# EAGLE board Active ele custom (EAGLE 7.6.0)
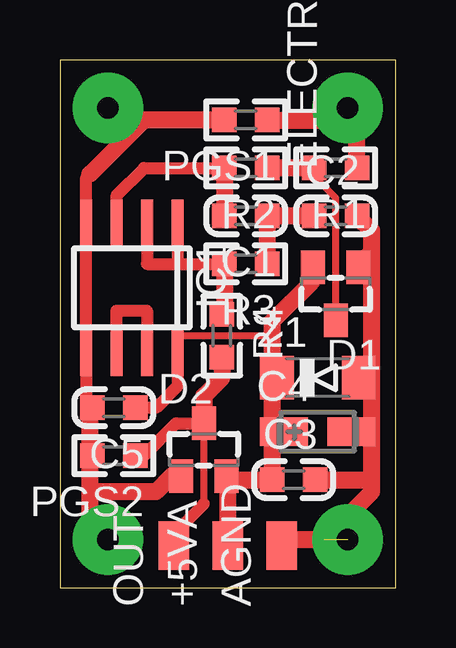
[diagram p0: board, top side]
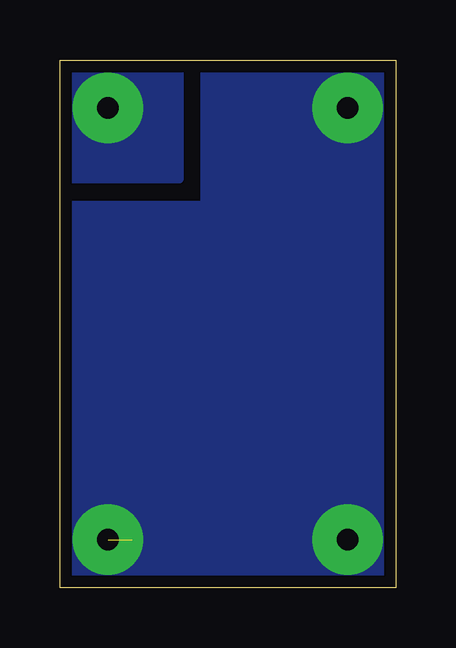
[diagram p1: board, bottom side, seen from below]

Size 14 x 22 mm. Coordinates in mm from the lower left corner, seen from the top.
Outline: 0,0 14,0 14,22 0,22 0,0
Copper layers (1*16): Top 0.035mm / dielectric 1.5mm / Bottom 0.035mm
Design rules "default *": minimum track width 10mil, minimum drill 24mil, track to track 8mil, track to pad 8mil, pad to pad 8mil, via to via 8mil, smd to smd 8mil, copper to edge 0.5mm, drill to drill 8mil, minimum pad ring 10mil, minimum via ring 40mil, stop-mask expansion 4mil, vias tented up to drill 0mil, thermal gap 15mil
Net classes: 1 pwr: width 0.4 mm, clearance 0.23 mm

## Footprints (pad centres in the part's own frame; a part is rotated, then mirrored left to right if it is on the bottom)
SMD80/50 = smd 2.032 x 1.27: P$1 0,0
C0603_DWS = smd 1.016 x 1.016: 1 -0.889,0; 2 0.889,0
CT3216 = smd 2 x 1.2: + -1.4,0; - 1.4,0
SOT23C(BAT54S) = smd 1 x 1.4: 1 -0.95,-1.1; 2 0.95,-1.1; 3 0,1.1
SO08 = smd 0.508 x 2.032: 1 -1.905,-2.667; 2 -0.635,-2.667; 3 0.635,-2.667; 4 1.905,-2.667; 5 1.905,2.667; 6 0.635,2.667; 7 -0.635,2.667; 8 -1.905,2.667
0603 = smd 1.016 x 1.016: 1 -0.889,0; 2 0.889,0
R0603_5MIL_DWS = smd 1.016 x 1.016: 1 -0.889,0; 2 0.889,0
MINI-MELF = smd 1.4 x 1.8: 1 -1.7,0; 2 1.7,0

## Placement (x,y rotation side)
+5VA  TESTPAD80/50  [SMD80/50]  7,1.75 90 top
AGND  TESTPAD80/50  [SMD80/50]  9.25,1.75 90 top
C1  100pF/COG/5%  [C0603_DWS]  7.75,15.5 180 top
C2  100pF/COG/5%  [C0603_DWS]  11.5,15.5 0 top
C3  100nF/X7R/10%  [C0603_DWS]  9.75,4.5 0 top
C4  47µF/6.3V/TANT  [CT3216]  10.75,6.5 0 top
C5  10nF/X7R/10%  [C0603_DWS]  2.25,7.5 180 top
D1  BAV199(1156415)  [SOT23C(BAT54S)]  11.5,12.25 180 top
D2  BAV199(1156415)  [SOT23C(BAT54S)]  6,5.75 0 top
ELECTRODE  TESTPAD80/50  [SMD80/50]  12,20 90 top
IC1  TL062CD  [SO08]  3,12.5 180 top
OUT  TESTPAD80/50  [SMD80/50]  4.75,1.75 90 top
PGS1  PGB1010603MR(F2594TR-ND)  [0603]  7.75,19.5 180 top
PGS2  PGB1010603MR(F2594TR-ND)  [0603]  2.25,5.5 180 top
R1  2.2k  [R0603_5MIL_DWS]  11.5,17.5 180 top
R2  2.2k  [R0603_5MIL_DWS]  7.75,17.5 180 top
R3  10k  [R0603_5MIL_DWS]  7.75,13.5 180 top
R4  100R  [R0603_5MIL_DWS]  6.75,10.5 270 top
Z1  BZV55C6V2  [MINI-MELF]  10.75,8.75 0 top

## Library data of the parts
+5VA AGND ELECTRODE OUT Z1 = gogo
C1-C5 R1-R4 = rcl
D1 D2 = semicon-smd-ipc
IC1 = linear
PGS1 PGS2 = OLIMEX_DISCRET

## Nets
+5V: +5VA.P$1 C3.1 C4.+ C5.1 D1.2 D2.2 IC1.8 Z1.1
E-OUT: D2.3 OUT.P$1 PGS2.1 R4.2
ELECTRODE: ELECTRODE.P$1 PGS1.1 R1.1
GNDA [pwr]: AGND.P$1 C2.2 C3.2 C4.- C5.2 D1.1 D2.1 IC1.4 IC1.5 PGS1.2 PGS2.2 Z1.2
N$1: IC1.6 IC1.7
N$2: IC1.1 IC1.2 R3.2 R4.1
N$4: C1.2 IC1.3 R2.2
N$5: C1.1 C2.1 R3.1
N$6: D1.3 R1.2 R2.1

## Tracks (layer width: path | path; a pad name or v marks a point on that pad's centre or on a via)
+5V
  Top 0.3: 8.86,10.5 4.91,10.5
  Top 0.5: C5.1 4,7.5 4.91,8.4 IC1.8 4.91,10.5 | Z1.1 9.05,8.69 8.86,8.5 8.86,10.5 | C4.+ 9.11,6.5 8.86,6.25
  Top 0.7: +5VA.P$1 7,4.5 | 7,4.5 C3.1 8.86,6.25 8.86,8.5 8.86,11.11 10.5,12.75 10.5,13.3 D1.2 | 7,4.5 7,4.65 D2.2
E-OUT
  Top 0.3: 6,3.5 D2.3
  Top 0.5: PGS2.1 3.5,5.5 4.85,6.85 D2.3 | OUT.P$1 4.75,2.25 6,3.5
  Top 0.7: R4.2 6.75,8.75 6,8 D2.3
ELECTRODE  (via drill 0.9)
  Top 0.7: PGS1.1 12.5,19.5 ELECTRODE.P$1 12.39,19.64 R1.1
  other vias: 12,20
  pour Bottom: 14,22 9,22 9,17 14,17
GNDA  (via drill 0.9)  (1 unrouted)
  Top 0.5: C5.2 1.25,7.5 1.09,7.5 IC1.5 IC1.4 1.09,17.09 1.25,17.25
  Top 0.7: PGS1.2 3.5,19.5 1.25,17.25 | 12.75,6.5 C4.- 12.5,6.5 13,6 | C3.2 13,4.5 | v2,2 1.25,2.75 1.25,4 | D2.1 4.65,4.65 4,4 1.25,4 | 1.25,4 1.25,5.39 | 1.25,5.39 1.25,7.5 | PGS2.2 1.25,5.39 | 13,4.5 13,4 11,2 9.5,2 AGND.P$1 | 13,4.5 13,6 | 13,6 13,8.75 | 13,8.75 13,14 | 13,14 13,14.89 C2.2 | Z1.2 13,8.75 | D1.1 12.45,13.45 13,14
  other vias: 12,2 2,20
  pour Bottom: 0,0 14,0 14,16 8,16 8,22 0,22
N$1
  Top 0.5: IC1.6 2.36,11.54 3.63,11.54 IC1.7
N$2
  Top 0.5: IC1.2 3.63,13.5 4.91,13.5 | 4.91,13.5 R3.2 | IC1.1 4.91,13.5
  Top 0.7: R3.2 6.86,11.5 R4.1
N$4
  Top 0.5: IC1.3 2.37,16.36 3.5,17.5 R2.2
  Top 0.7: R2.2 C1.2
N$5
  Top 0.7: C2.1 C1.1 R3.1
N$6
  Top 0.3: D1.3 11.5,16.25 10.61,17.14
  Top 0.5: 10.61,17.14 R1.2
  Top 0.7: R1.2 R2.1